# Altium PCB 2019-02-23_14-13-01.PcbDoc
Units mil, origin at the board's own origin, x right, y up, seen from the top; angles counter-clockwise.
Board outline 3240 x 1760 mil, 4 copper layers (Top Layer, MidLayer1, MidLayer2, Bottom Layer); 24 components, 13 nets, 59 pads, 60 vias.
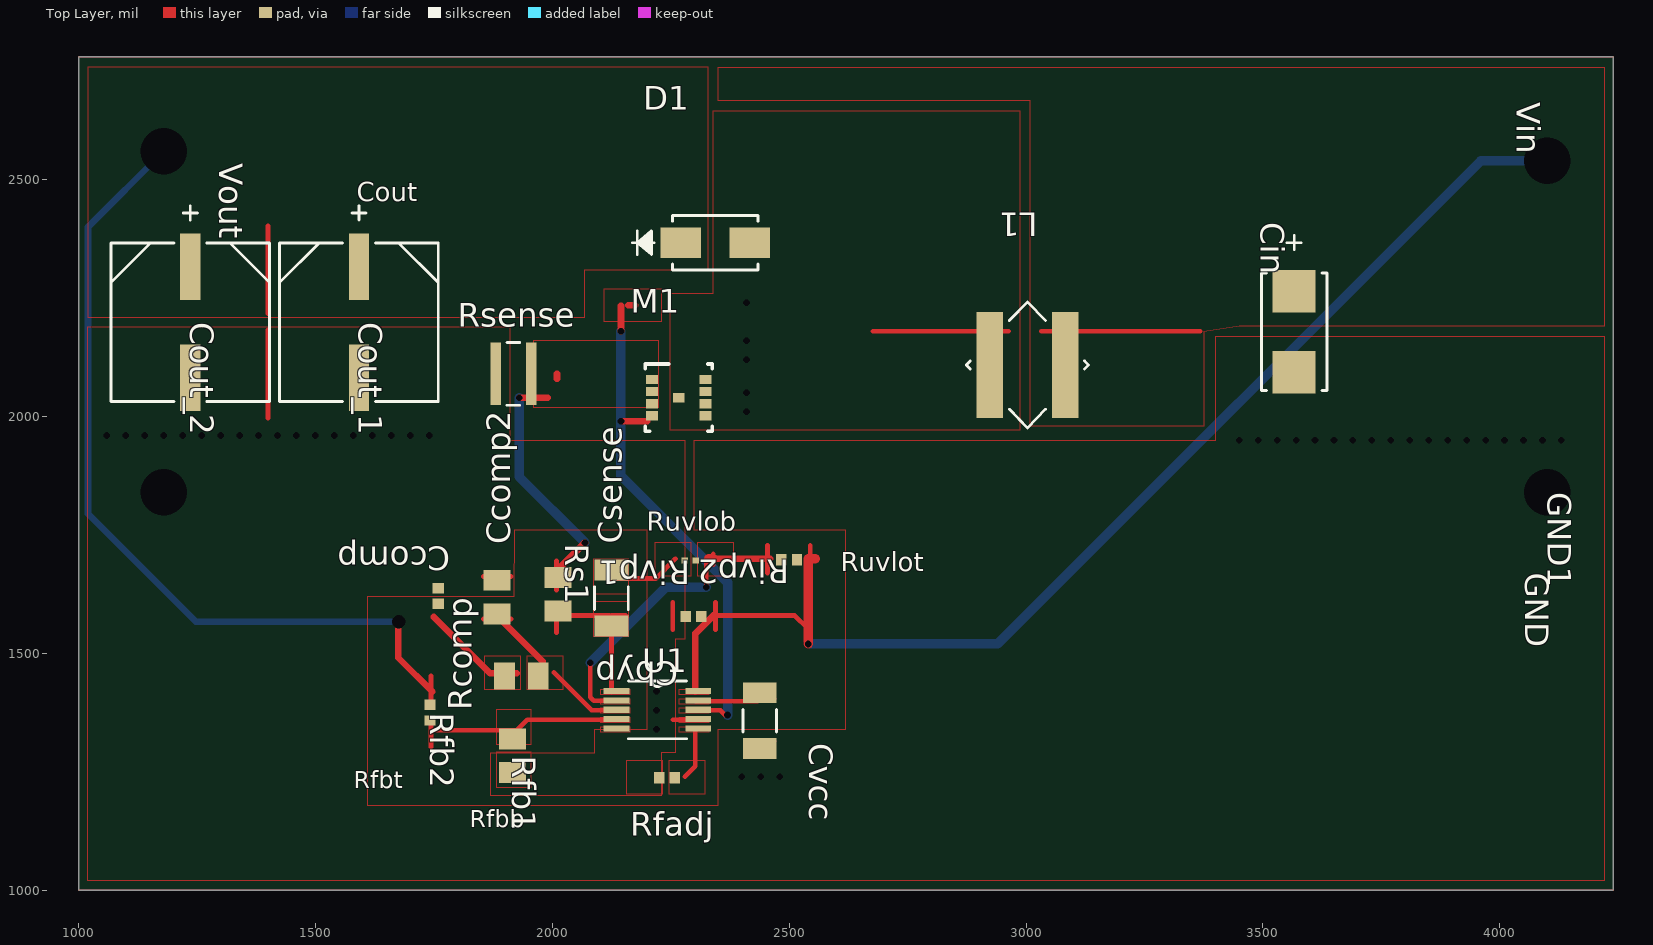
[diagram p0: Top Layer view]
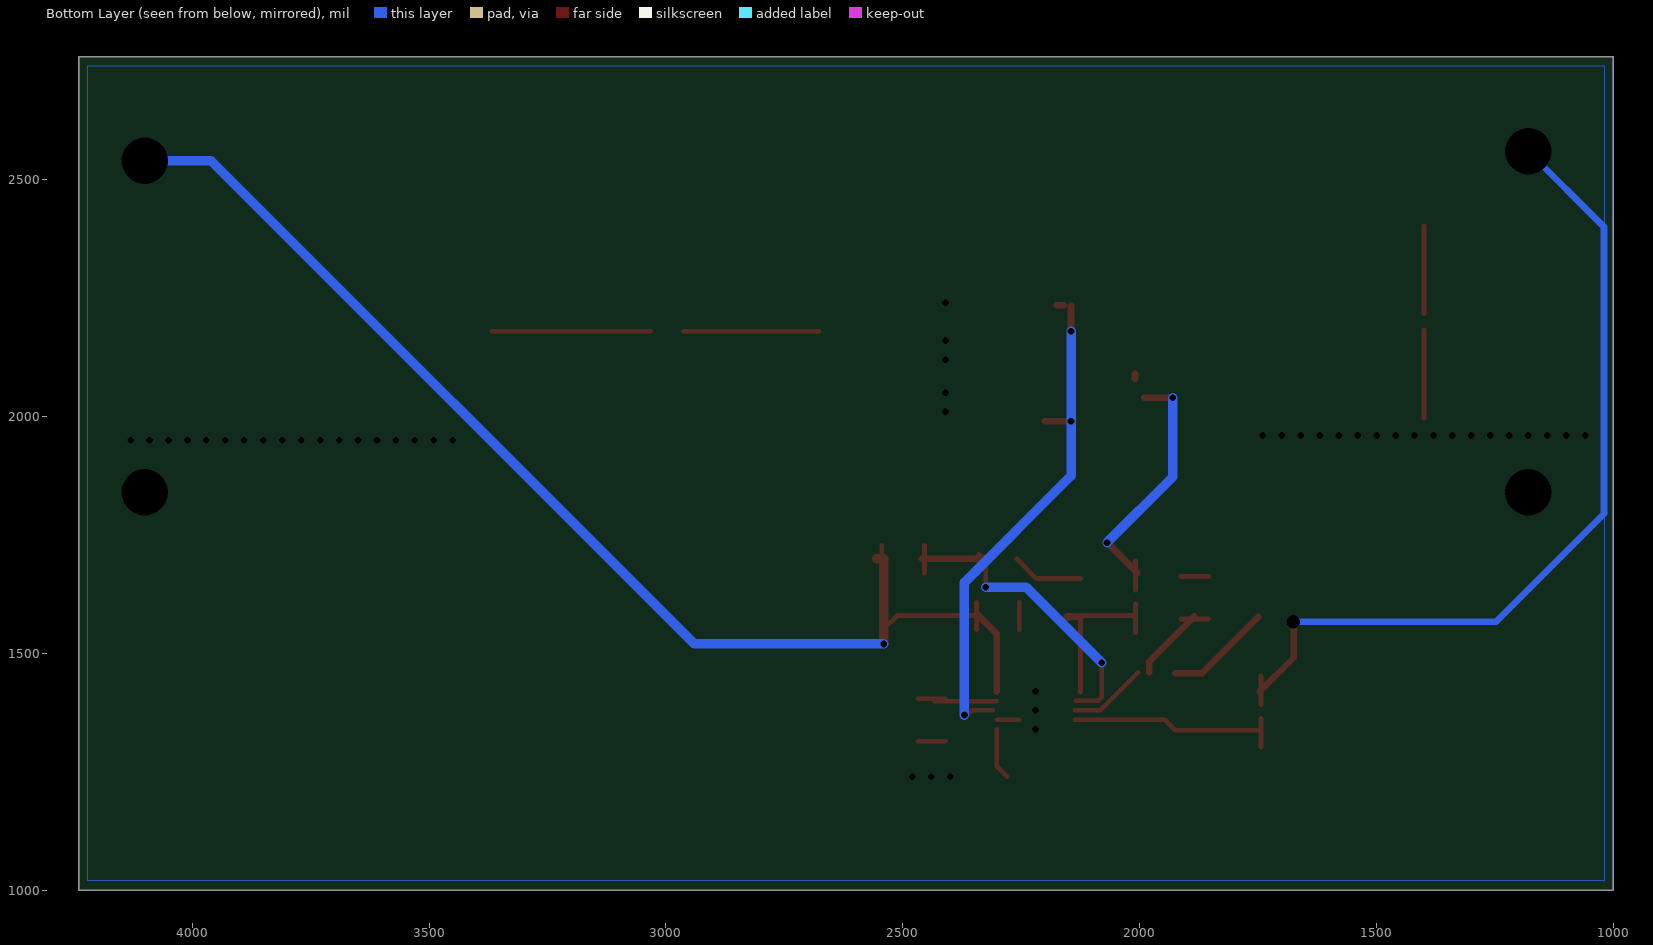
[diagram p1: Bottom Layer view, seen from below]

## Layer stack, top to bottom
Top Layer: signal copper 1.4
Dielectric: core 12.6, FR-4, Dk 4.8
MidLayer1: signal copper 1.4
Dielectric: prepreg 12.6, FR-4, Dk 4.8
MidLayer2: signal copper 1.4
Dielectric: core 12.6, FR-4, Dk 4.8
Bottom Layer: signal copper 1.4

## Board outline
1000,1000 4240,1000 4240,2760 1000,2760

## Design rules (kind name [scope] priority, off if disabled: settings)
PlaneConnect [All] p0: scope1count=1 scope1_0_kind=Board scope1_0_value=Board scope2count=1 scope2_0_kind=Board scope2_0_value=Board commentlength=0 planeconnectstyle=Direct reliefexpansion=20 reliefentries=4 reliefconductorwidth=10 reliefairgap=10
PlaneConnect [All] p1: planeconnectstyle=Direct reliefexpansion=20 reliefentries=4 reliefconductorwidth=10 reliefairgap=10
PolygonConnect [All] p0: scope1count=1 scope1_0_kind=Board scope1_0_value=Board scope2count=1 scope2_0_kind=Board scope2_0_value=Board commentlength=0 connectstyle=Direct reliefconductorwidth=10 reliefentries=4 polygonreliefangle="90 Angle"
PolygonConnect [All] p1: connectstyle=Direct reliefconductorwidth=10 reliefentries=4 polygonreliefangle="90 Angle"

## Components (designator, comment, footprint, x,y, rotation, side; value= is the part's Value field where it differs from the comment)
Cbyp "" 0402 2298,1578 r180 top
Ccomp "" 0805 1935,1452 r180 top
Ccomp2 "" 0805 1883,1619 r90 top
Cin "" 6032-28 3566,2179 r270 top
Cout_1 "" CAPSMT_62_E12 1592,2199 r270 top
Cout_2 "" CAPSMT_62_E12 1236,2199 r270 top
Csense "" 1206 2125,1617 r90 top
Cvcc "" 1206 2438,1358 r270 top
D1 "" SMA 2344,2367 r0 top
GND "" TP-1502 1180,1835 r270 top
GND1 "" TP-1502 4101,1840 r270 top
L1 "" XAL6060 3003,2109 r180 top
M1 "" DQG0008A 2267,2040 r0 top
Rcomp "" 0402 1759,1621 r90 top
Rfadj "" 0402 2242,1238 r0 top
Rfb1 "" 0805 1916,1284 r270 top
Rfb2 "" 0402 1742,1375 r270 top
Rivp1 "" 0201 2291,1696 r180 top
Rivp2 "" 0402 2500,1698 r180 top
Rs1 "" 0805 2012,1625 r270 top
Rsense "" 0612 1918,2090 r0 top
U1 "" MUB10A 2222,1381 r0 top
Vin "" TP-1502 4101,2538 r270 top
Vout "" TP-1502 1186,2568 r270 top

## Footprints (in the part's own frame and the unit in brackets; to place one, negate y for a bottom-side part, rotate by r counter-clockwise, add the part's x,y. Pads: shape width x height; smd on the part's side, far side on the other; paste and mask are expansions set on the pad)
0201 [mil]
  rect 14x13 smd: 1(-11.5,0) 2(11.5,0)
0402 [mil]
  rect 22x24 smd: 1(-16.5,0) 2(16.5,0)
0612 [mil]
  rect 22x132 smd: 1(-37.5,0) 2(37.5,0)
  silkscreen extent -13,-66 13,66
0805 [mil]
  rect 44x57 smd: 1(-35.5,0) 2(35.5,0)
1206 [mil]
  rect 44x71 smd: 1(-59,0) 2(59,0)
  silkscreen extent -24,-36 24,36
6032-28 [mil]
  rect 89x91 smd: 1(-85.5,0) 2(85.5,0)
  silkscreen extent -203,-69 124,69
CAPSMT_62_E12 [mil]
  rect 140x43 smd: 1(-117,0) 2(117,0)
  silkscreen extent -246,-168 168,168
DQG0008A [mm]
  rect 0.63x0.5 smd: 1(-1.435,0.975) 2(-1.435,0.325) 3(-1.435,-0.325) 4(-1.435,-0.975) 5(1.435,-0.975) 6(1.435,-0.325) 7(1.435,0.325) 8(1.435,0.975) 9(0,0)
  silkscreen extent -1.8,-1.8 1.8,1.8
MUB10A [mil]
  rect 54x13 smd: 1(-86.5,39.37) 2(-86.5,19.68) 3(-86.5,0) 4(-86.5,-19.68) 5(-86.5,-39.37) 6(86.5,-39.37) 7(86.5,-19.68) 8(86.5,0) 9(86.5,19.68) 10(86.5,39.37)
  silkscreen extent -61,-61 61,61
SMA [mil]
  rect 86x64 smd: 1(-73,0) 2(73,0)
  silkscreen extent -174,-58 90,58
TP-1502 [mil]
  round 65 / inner round 0 / far side round 65 hole 32: 1(0,0)
XAL6060 [mil]
  rect 56x224 smd: 1(-79.5,0) 2(79.5,0)
  silkscreen extent -129,-133 129,133

## Via types
v1: diameter 0, hole 14, Top Layer to Bottom Layer, 55 vias
v2: diameter 0, hole 98, Top Layer to Bottom Layer, 4 vias
v3: diameter 0, hole 28, Top Layer to Bottom Layer, 1 vias

## Nets (pads, with @x,y where several pads share a name; then routed paths per layer and width w, separated by ;. In a path a pad name is that pad's centre, name@x,y a point inside that pad or via, vN(x,y) a via of type N, cw(c..) or ccw(c..) an arc to the next point about the centre after c; other vN are vias at no path point)
0: Cbyp.2 Ccomp2.2 Cin.2 Cout_1.2 Cout_2.2 Csense.2 Cvcc.2 GND1.1 GND.1 Rcomp.2 Rfadj.1 Rfb1.2 Rivp1.2 Rsense.1 U1.5 U1.7 | length 559.4
  Top Layer w10: 1400,1997 1400,2183 ; Ccomp2.2@1855,1662.5 1913,1662.5 ; Csense.2@2125,1658 2218,1658 2260,1700 ; 2254.5,1550 2254.5,1608 ; 2255,1360 U1.7@2302,1360 ; Cvcc.2@2410,1314.5 Cvcc.2@2468,1314.5
  other v1: 2400,1240 2440,1240 2480,1240 2220,1340 2220,1380 2220,1420 3450,1950 3490,1950 3530,1950 3570,1950 3610,1950 3650,1950 3690,1950 3730,1950 3770,1950 3810,1950 3850,1950 3890,1950 3930,1950 3970,1950 4010,1950 4050,1950 4090,1950 4130,1950 1060,1960 1100,1960 1140,1960 1180,1960 1220,1960 1260,1960 1300,1960 1340,1960 1380,1960 1420,1960 1460,1960 1500,1960 1540,1960 1580,1960 1620,1960 1660,1960 1700,1960 1740,1960
  other v2: 1180,1840 4100,1840
1: Cbyp.1 Cin.1 L1.1 Rivp2.1 U1.10 Vin.1 | length 3037.8
  Top Layer w10: 2340,1580 2512,1580 2540,1552 ; 2344.5,1550 2344.5,1608 ; 2544.5,1670 2544.5,1728 ; 3032,2180 3368,2180
  Top Layer w14: U1.10@2302,1419 2302,1542 2340,1580
  Top Layer w20: v1(2540,1520) 2540,1552 2540,1700 2555,1700
  Bottom Layer w20: v1(2540,1520) 2940,1520 3960,2540 v2(4100,2540) Vin.1@4100,2560
2: Cvcc.1 U1.9 | length 190
  Top Layer w10: U1.9@2302,1399 Cvcc.1@2434,1399 ; Cvcc.1@2410,1404.5 Cvcc.1@2468,1404.5
3: Csense.1 U1.1 | length 364.2
  Top Layer w10: 2009,1544 2009,1605 ; 2010,1580 2120,1580 ; U1.1@2125,1418 Csense.1@2125,1578
  Top Layer w14: Csense.1@2125,1578 2154,1578 Csense.1@2151,1575
4: D1.2 L1.2 M1.5 M1.6 M1.7 M1.8 M1.9 | length 286
  Top Layer w10: 2677,2180 2963,2180
  other v1: 2410,2010 2410,2050 2410,2120 2410,2160 2410,2240
5: Rivp1.1 Rivp2.2 Rs1.2 U1.2 | length 707.6
  Top Layer w10: v1(2080,1480) 2080,1408 2088,1400 U1.2@2135,1400 ; v1(2325,1640) 2325,1695 ; 2340,1687 2340,1700 2340,1710 ; 2454.5,1670 2454.5,1728
  Top Layer w14: 2340,1700 2460,1700
  Top Layer w20: 2330,1700 2340,1700
  Bottom Layer w20: v1(2080,1480) 2240,1640 v1(2325,1640)
6: Ccomp2.1 Ccomp.1 U1.3 | length 382.5
  Top Layer w10: Ccomp2.1@1855,1572.5 1913,1572.5 ; 2003,1460 2083,1380 U1.3@2137,1380
  Top Layer w14: Ccomp2.1@1885,1578 1980,1483 Ccomp.1@1980,1460
7: M1.1 M1.2 M1.3 Rs1.1 Rsense.2 | length 585.1
  Top Layer w10: 2009,1634 2009,1695
  Top Layer w14: v1(1930,2040) 1990,2040 ; Rs1.1@2005,1670 v1(2069,1734) ; 2010,2080 2010,2090
  Bottom Layer w20: v1(1930,2040) 1930,1873 v1(2069,1734)
8: Cout_1.1 Cout_2.1 D1.1 Rfb2.1 Vout.1 | length 2013.5
  Top Layer w10: 1400,2217 1400,2403 ; Rfb2.1@1744,1392 1744,1453
  Top Layer w14: 1675,1570 1675,1567 ; v3(1676,1567) 1675,1567 ; 1747,1419 1675,1491 1675,1567
  Bottom Layer w14: v2(1180,2560) 1020,2400 1020,1795 1248,1567 1679,1567
9: Rfb1.1 Rfb2.2 U1.4 | length 462.1
  Top Layer w10: 1744,1302 Rfb2.2@1744,1363 ; 1745,1338 1925,1338 1947,1360 U1.4@2137,1360
10: M1.4 U1.8 | length 1086.3
  Top Layer w10: U1.8@2310,1380 2355,1380 2365,1370 v1(2370,1370)
  Top Layer w14: v1(2145,2180) 2145,2234 ; 2150,1990 2200,1990 ; 2160,2235 2175,2235
  Bottom Layer w20: v1(2145,2180) 2145,1875 2370,1650 v1(2370,1370)
  other v1: 2145,1990
11: Rfadj.2 U1.6 | length 109.1
  Top Layer w10: 2280,1240 2302,1262 U1.6@2302,1340
12: Ccomp.2 Rcomp.1 | length 224.3
  Top Layer w14: 1750,1577 1869,1458 1925,1458

## Polygon pours and split planes (outlines as drawn)
5 on Top Layer " " (solid, pour order 0): 2307,1663 2307,1735 2382,1735 2382,1663
11 on Top Layer " " (solid, pour order 1): 2268,1334 2268,1345 2330,1345 2330,1334
10 on Top Layer " " (solid, pour order 2): 2268,1374 2268,1385 2330,1385 2330,1374
2 on Top Layer " " (solid, pour order 3): 2268,1393 2268,1404 2330,1404 2330,1393
1 on Top Layer " " (solid, pour order 4): 2268,1413 2268,1424 2330,1424 2330,1413
9 on Top Layer " " (solid, pour order 5): 2102,1354 2102,1365 2164,1365 2164,1354
6 on Top Layer " " (solid, pour order 6): 2102,1374 2102,1385 2164,1385 2164,1374
5 on Top Layer " " (solid, pour order 7): 2102,1393 2102,1404 2164,1404 2164,1393
3 on Top Layer " " (solid, pour order 8): 2102,1413 2102,1424 2164,1424 2164,1413
9 on Top Layer " " (solid, pour order 9): 1883,1307 1883,1382 1955,1382 1955,1307
11 on Top Layer " " (solid, pour order 10): 2247,1203 2247,1275 2322,1275 2322,1203
6 on Top Layer " " (solid, pour order 11): 1947,1423 1947,1495 2022,1495 2022,1423
12 on Top Layer " " (solid, pour order 12): 1857,1423 1857,1495 1932,1495 1932,1423
3 on Top Layer " " (solid, pour order 13): 2088,1535 2088,1610 2160,1610 2160,1535
4 on Top Layer " " (solid, pour order 14): 2340,2645 2987,2645 2987,1971 2249,1971 2249,2260 2340,2260
10 on Top Layer " " (solid, pour order 15): 2110,2270 2230,2270 2230,2200 2110,2200
1 on Top Layer " " (solid, pour order 16): 2350,2667 2350,2737 2423,2737 4220,2737 4220,2428 4220,2191 3450,2191 3375,2179 3375,1980 3009,1980 3009,2667
8 on Top Layer " " (solid, pour order 17): 1020,2210 2069,2210 2069,2310 2329,2310 2329,2737 1020,2737
7 on Top Layer " " (solid, pour order 18): 1960,2160 1960,2020 2225,2020 2225,2160
0 on Top Layer " " (solid, pour order 19): 2217,1663 2217,1735 2292,1735 2292,1663
0 on Top Layer " " (solid, pour order 20): 2268,1354 2268,1365 2330,1365 2330,1354
0 on Top Layer " " (solid, pour order 21): 2102,1334 2102,1345 2164,1345 2164,1334
0 on Top Layer " " (solid, pour order 22): 1883,1217 1883,1292 1955,1292 1955,1217
0 on Top Layer " " (solid, pour order 23): 2157,1203 2157,1275 2232,1275 2232,1203
0 on Top Layer " " (solid, pour order 24): 2088,1625 2088,1700 2160,1700 2160,1625
0 on Top Layer " " (solid, pour order 28): 1020,2190 1910,2190 1910,1950 2280,1950 2280,1530 2260,1530 2260,1290 2230,1290 2230,1200 1870,1200 1870,1290 2090,1290 2090,1340 2200,1340 2200,1760 1920,1760 1919,1620 1610,1620 1610,1180 2350,1180 2350,1340 2620,1340 2620,1760 2300,1760 2300,1950 3400,1950 3400,2170 4220,2170 4220,1020 1020,1020
0 on Bottom Layer " " (solid, pour order 25): 1020,1020 4220,1020 4220,2740 1020,2740
0 on MidLayer1 " " (solid, pour order 26): 1020,1020 4220,1020 4220,2740 1020,2740
0 on MidLayer2 " " (solid, pour order 27): 1020,1020 4220,1020 4220,2740 1020,2740

## Other copper
Multi-Layer:
  the board outline again, w1

## Silkscreen, mask and mechanical layers (free items; w line width, h text height)
Top Overlay:
  text "Cout" at 1587,2454 h40
  text "Ruvlob" at 2199,1759 h40
  text "Ruvlot" at 2609,1673 h40
  text "Rfbt" at 1581,1215 h36
  text "Rfbb" at 1826,1133 h36